# Altium PCB Control_Board_Model_C201_FFC_Sens_Conn.PcbDoc (part 2 of 12)
Units mil, origin at the board's own origin, x right, y up, seen from the top; angles counter-clockwise.
Board outline 3937.01 x 2755.91 mil, 6 copper layers (1-SIG-TOP, 2-GND, 3-PWR, 4-SIG-HOR, 5-SIG-VERT, 6-GND-BOT), stack 46.063 mil thick; 497 components, 379 nets, 1804 pads, 1610 vias.
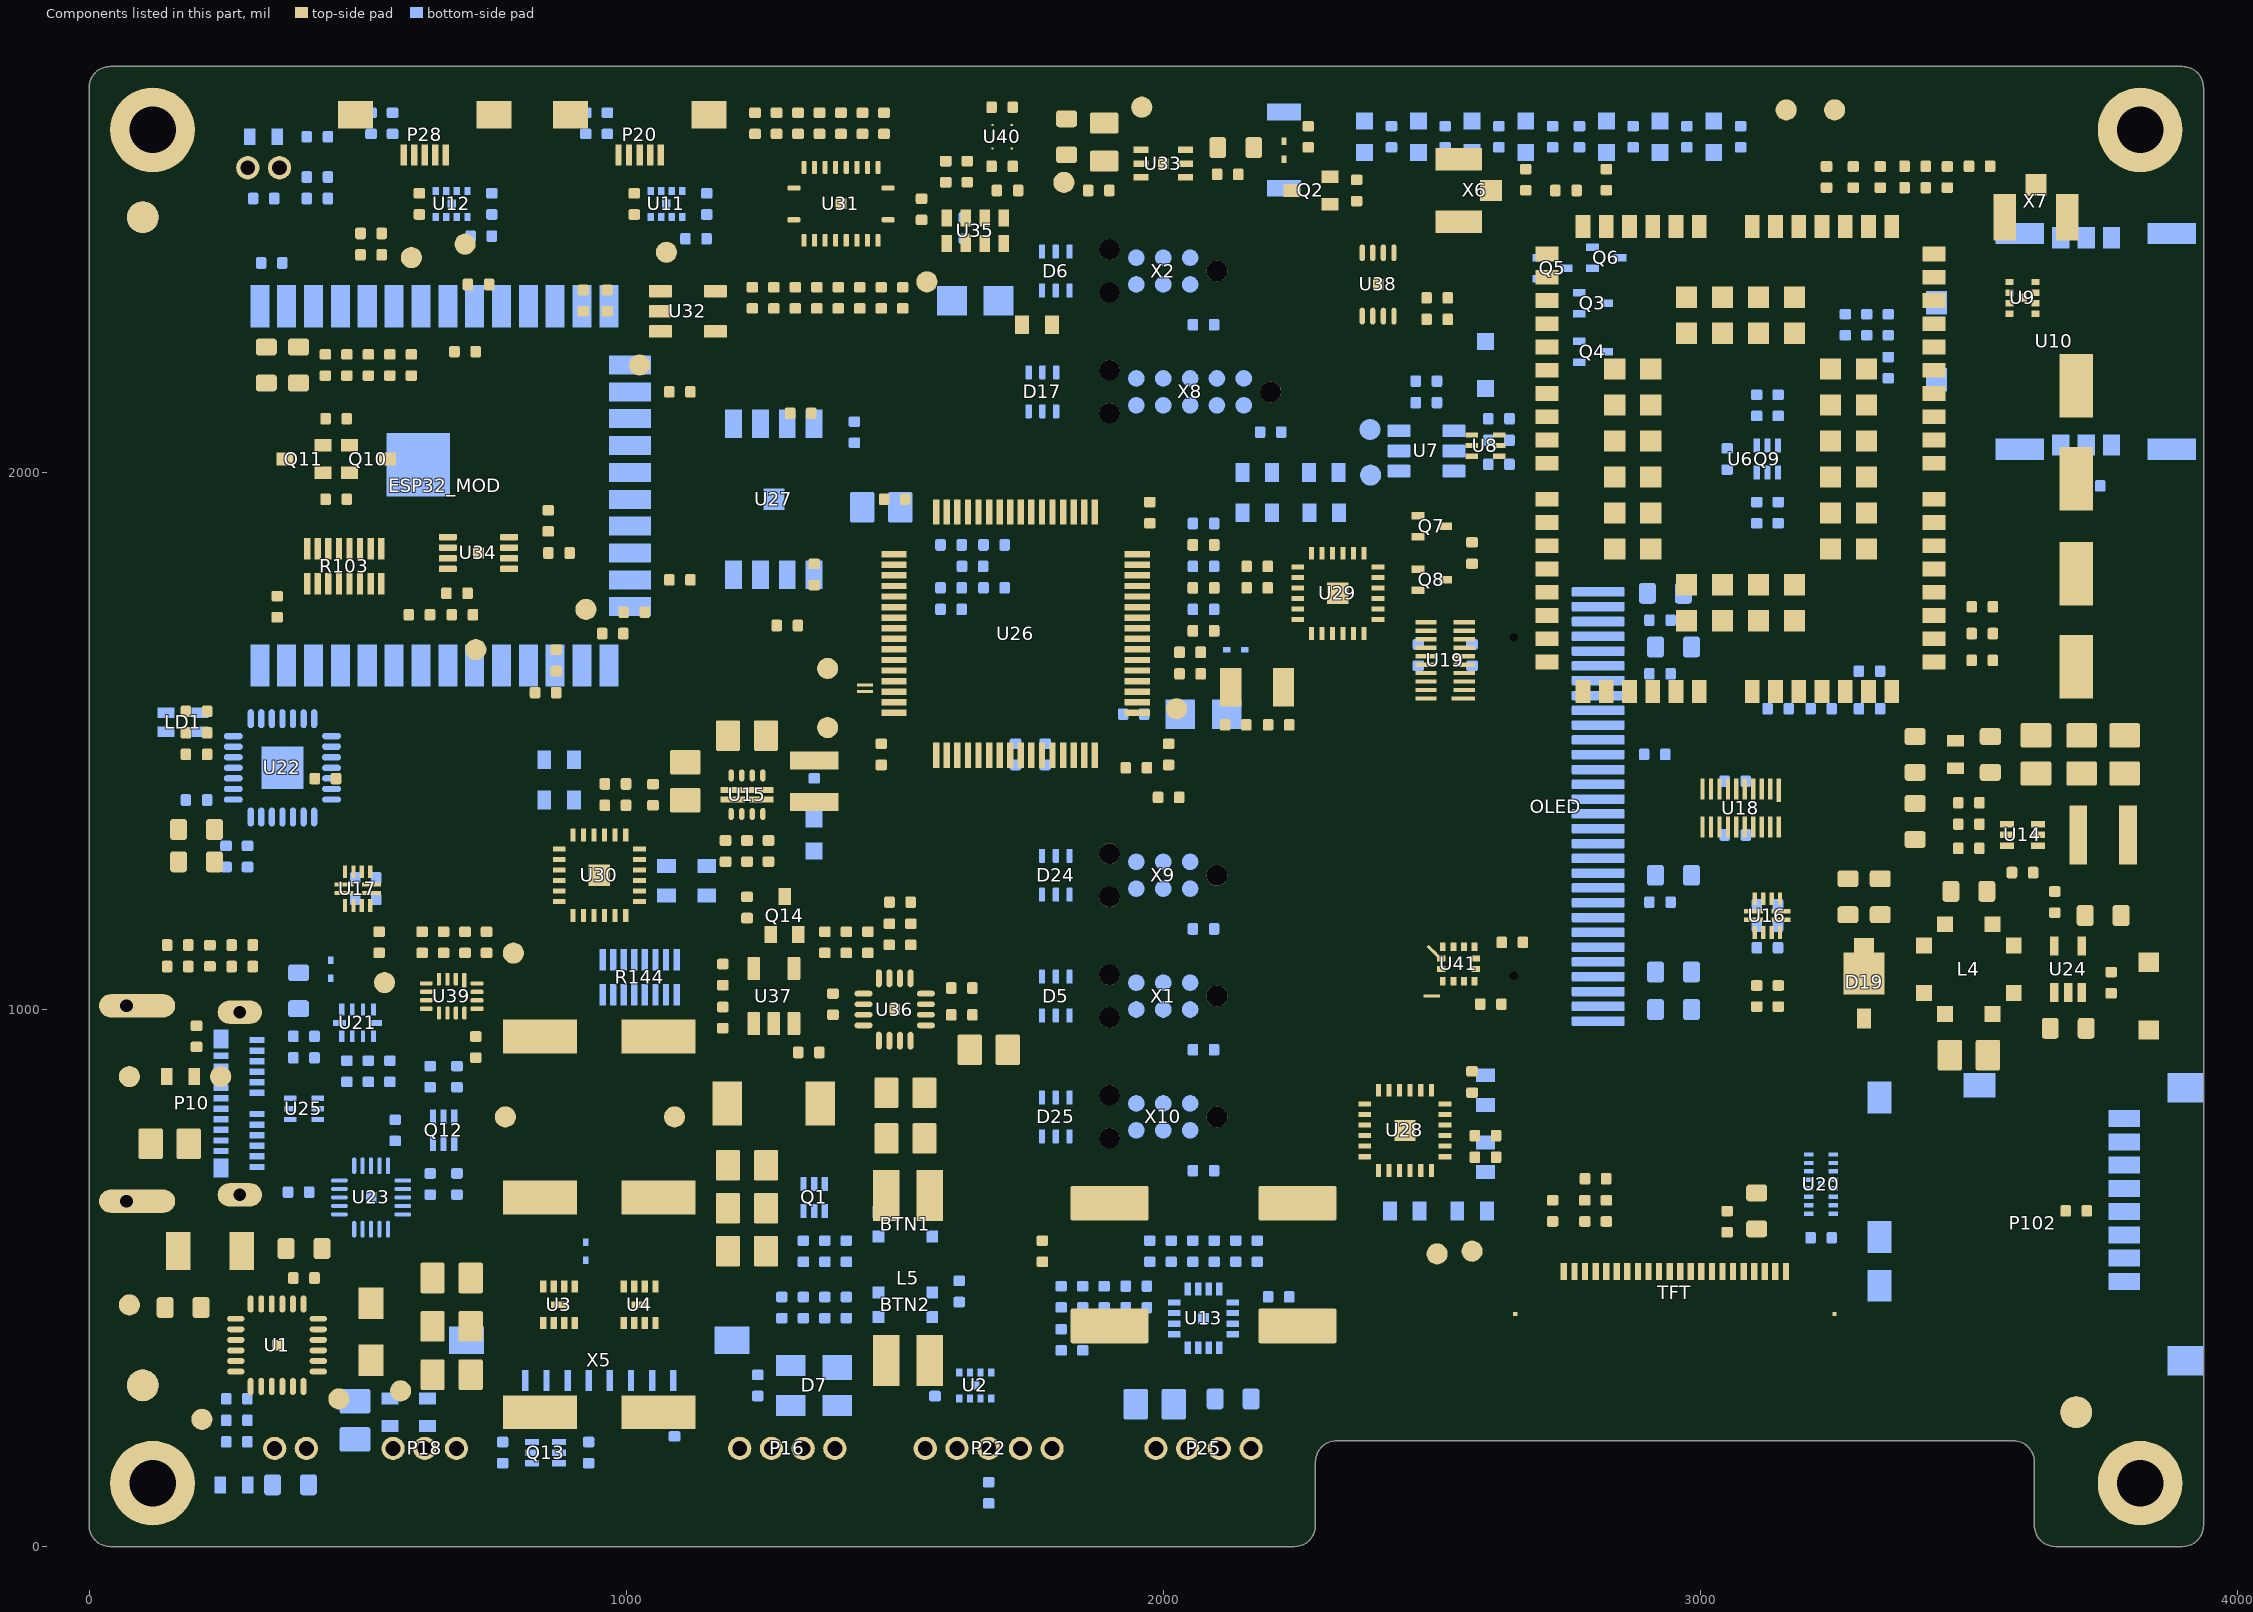
[diagram p6: the components of this part, seen from the top]

## Components (designator, comment, footprint, x,y, rotation, side; value= is the part's Value field where it differs from the comment) (continued)
R106 "RES SMD 402 OHM 1% 1/16W 0402" R0402 200,1475 r180 top (schematic designator R5)
R107 "RES SMD 47K OHM 1% 1/16W 0402" R0402 200,1390 r180 bottom (schematic designator R6)
R108 "RES SMD 10K OHM 1% 1/16W 0402" R0402 440,1430 r0 top (schematic designator R7)
R109 "RES SMD 1K OHM 1% 1/16W 0402" R0402 2725,625 r270 top (schematic designator R1)
R110 "RES SMD 910K OHM 1% 1/16W 0402" R0402 2925,1625 r0 bottom (schematic designator R1)
R111 "RES SMD 1K OHM 1% 1/16W 0402" R0402 2915,1475 r180 bottom (schematic designator R2)
R112 "RES SMD 2.26 OHM 1% 1/10W 0603" R0603 3685,965 r0 top (schematic designator R1)
R113 "RES SMD 63.4K OHM 1% 1/16W 0402" R0402 3765,1050 r270 top (schematic designator R2)
R114 "RES SMD 100K OHM 1% 1/16W 0402" R0402 635,875 r270 bottom (schematic designator R2)
R115 "RES SMD 100K OHM 1% 1/16W 0402" R0402 685,675 r90 bottom (schematic designator R3)
R116 "DNP*" R0402 165,1120 r0 top (schematic designator R4)
R117 "RES SMD 10K OHM 1% 1/16W 0402" R0402 285,1120 r0 top (schematic designator R5)
R118 "RES SMD 0 OHM JUMPER 1/16W 0402" R0402 225,1100 r270 top (schematic designator R6)
R119 "DNP*" R0402 165,1080 r0 top (schematic designator R7)
R120 "RES SMD 10K OHM 1% 1/16W 0402" R0402 285,1080 r0 top (schematic designator R8)
R121 "RES SMD 0 OHM JUMPER 1/16W 0402" R0402 720,930 r90 top (schematic designator R9)
R122 "DNP*" R0402 620,1125 r90 top (schematic designator R10)
R123 "RES SMD 10K OHM 1% 1/16W 0402" R0402 515,1205 r180 bottom (schematic designator R11)
R124 "RES SMD 10K OHM 1% 1/16W 0402" R0402 515,1245 r180 bottom (schematic designator R12)
R125 "RES SMD 2.2 OHM 1% 1/16W 0402" R0402 400,910 r0 bottom (schematic designator R13)
R126 "RES SMD 2.2 OHM 1% 1/16W 0402" R0402 520,885 r90 bottom (schematic designator R14)
R127 "RES SMD 2.2 OHM 1% 1/16W 0402" R0402 480,885 r90 bottom (schematic designator R15)
R128 "DNP*" R0402 660,1125 r270 top (schematic designator R16)
R129 "RES SMD 0 OHM JUMPER 1/16W 0402" R0402 560,885 r270 bottom (schematic designator R17)
R130 "RES SMD 0 OHM JUMPER 1/16W 0402" R0402 1945,1550 r0 bottom (schematic designator R1)
R131 "RES SMD 0 OHM JUMPER 1/16W 0402" R0402 1645,1825 r180 bottom (schematic designator R2)
R132 "RES SMD 100 OHM 1% 1/16W 0402" R0402 2050,1665 r180 top (schematic designator R3)
R133 "RES SMD 390K OHM 1% 1/16W 0402" R0402 2075,1785 r180 top (schematic designator R38)
R134 "RES SMD 390K OHM 1% 1/16W 0402" R0402 2075,1705 r180 top (schematic designator R39)
R135 "RES SMD 100K OHM 1% 1/16W 0402" R0402 770,175 r270 bottom (schematic designator R40)
R136 "RES SMD 75K OHM 1% 1/16W 0402" R0402 2075,1825 r180 bottom (schematic designator R41)
R137 "RES SMD 75K OHM 1% 1/16W 0402" R0402 2075,1705 r180 bottom (schematic designator R42)
R138 "RES SMD 100K OHM 1% 1/16W 0402" R0402 930,175 r270 bottom (schematic designator R43)
R139 "RES SMD 27K OHM 1% 1/16W 0402" R0402 2075,1865 r180 top (schematic designator R44)
R140 "RES SMD 75K OHM 1% 1/16W 0402" R0402 2075,1865 r180 bottom (schematic designator R45)
R141 "RES SMD 10K OHM 1% 1/16W 0402" R0402 1350,1810 r270 top (schematic designator R1)
R142 "RES SMD 10K OHM 1% 1/16W 0402" R0402 1300,1715 r180 top (schematic designator R2)
R143 "RES SMD 10K OHM 1% 1/16W 0402" R0402 1325,2110 r180 top (schematic designator R3)
R144 "RES ARRAY 8 RES 100K OHM 1606" YAG_YC248 1025,1060 r270 bottom (schematic designator R57)
R145 "RES SMD 4.75K OHM 1% 1/16W 0402" R0402 1320,2650 r90 top (schematic designator R102)
R146 "RES SMD 4.75K OHM 1% 1/16W 0402" R0402 1280,2650 r90 top (schematic designator R103)
R147 "RES SMD 4.75K OHM 1% 1/16W 0402" R0402 1275,2325 r270 top (schematic designator R104)
R148 "RES SMD 4.75K OHM 1% 1/16W 0402" R0402 1315,2325 r270 top (schematic designator R105)
R149 "RES SMD 4.75K OHM 1% 1/16W 0402" R0402 1395,2325 r270 top (schematic designator R106)
R150 "RES SMD 4.75K OHM 1% 1/16W 0402" R0402 1435,2325 r270 top (schematic designator R107)
R151 "RES SMD 10K OHM 1% 1/16W 0402" R0402 1360,2650 r270 top (schematic designator R108)
R152 "RES SMD 10K OHM 1% 1/16W 0402" R0402 1240,2650 r270 top (schematic designator R109)
R153 "RES SMD 10K OHM 1% 1/16W 0402" R0402 1355,2325 r90 top (schematic designator R110)
R154 "RES SMD 4.75K OHM 1% 1/16W 0402" R0402 1440,2650 r90 top (schematic designator R111)
R155 "RES SMD 4.75K OHM 1% 1/16W 0402" R0402 1400,2650 r90 top (schematic designator R112)
R156 "RES SMD 10K OHM 1% 1/16W 0402" R0402 1480,2650 r270 top (schematic designator R113)
R157 "RES SMD 10K OHM 1% 1/16W 0402" R0402 2120,2555 r0 top (schematic designator R1)
R158 "RES SMD 100 OHM 1% 1/2W 0805" R0805 1890,2615 r90 top (schematic designator R2)
R159 "RES SMD 10K OHM 1% 1/16W 0402" R0402 1630,2455 r270 bottom (schematic designator R1)
R160 "RES SMD 402 OHM 1% 1/16W 0402" R0402 1595,2560 r90 bottom (schematic designator R2)
R161 "RES SMD 10K OHM 1% 1/16W 0402" R0402 1595,2560 r270 top (schematic designator R3)
R162 "RES SMD 54.9K OHM 1% 1/16W 0402" R0402 1385,1010 r90 top (schematic designator R1)
R163 "RES SMD 1.2K OHM 1% 1/16W 0402" R0402 1530,1140 r270 top (schematic designator R2)
R164 "DNP*" R0402 1340,920 r0 top (schematic designator R3)
R165 "RES SMD 10K OHM 1% 1/16W 0402" R0402 1450,1125 r90 top (schematic designator R4)
R166 "RES SMD 2.7K OHM 1% 1/16W 0402" R0402 1370,1125 r270 top (schematic designator R5)
R167 "RES SMD 44.2K OHM 1% 1/16W 0402" R0402 1410,1125 r270 top (schematic designator R6)
R168 "RES SMD 11K OHM 1% 1/16W 0402" R0402 1225,1190 r270 top (schematic designator R7)
TFT "LH200K-IF05" CONN_0524352271 2952.76,389.76 r90 top locked
TP1 "Test Point Pad" TESTPOINT 925,1745 r90 top (schematic designator TP3)
TP2 "Test Point Pad" TESTPOINT 720,1670 r90 top (schematic designator TP4)
TP3 "Test Point Pad" TESTPOINT 2510,545 r90 top (schematic designator TP5)
TP4 "Test Point Pad" TESTPOINT 2575,550 r90 top (schematic designator TP6)
TP5 "Test Point Pad" TESTPOINT 1075,2410 r90 top (schematic designator TP7)
TP6 "Test Point Pad" TESTPOINT 1025,2200 r90 top (schematic designator TP8)
TP7 "Test Point Pad" TESTPOINT 790,1105 r90 top (schematic designator TP9)
TP8 "Test Point Pad" TESTPOINT 550,1050 r90 top (schematic designator TP10)
TP9 "Test Point Pad" TESTPOINT 700,2425 r90 top (schematic designator TP11)
TP10 "Test Point Pad" TESTPOINT 600,2400 r90 top (schematic designator TP12)
TP11 "Test Point Pad" TESTPOINT 1090,800 r90 top (schematic designator TP13)
TP12 "Test Point Pad" TESTPOINT 1960,2680 r90 top (schematic designator TP14)
TP13 "Test Point Pad" TESTPOINT 3160,2675 r90 top (schematic designator TP15)
TP14 "Test Point Pad" TESTPOINT 1375,1525 r90 top (schematic designator TP16)
TP15 "Test Point Pad" TESTPOINT 580,290 r90 top (schematic designator TP17)
TP16 "Test Point Pad" TESTPOINT 465,275 r90 top (schematic designator TP18)
TP17 "Test Point Pad" TESTPOINT 245,875 r90 top (schematic designator TP19)
TP18 "Test Point Pad" TESTPOINT 75,875 r90 top (schematic designator TP20)
TP19 "Test Point Pad" TESTPOINT 1815,2540 r90 top (schematic designator TP21)
TP20 "Test Point Pad" TESTPOINT 3250,2675 r90 top (schematic designator TP22)
TP21 "Test Point Pad" TESTPOINT 1375,1635 r90 top (schematic designator TP23)
TP22 "Test Point Pad" TESTPOINT 775,800 r90 top (schematic designator TP24)
TP23 "Test Point Pad" TESTPOINT 210,237 r90 top (schematic designator TP25)
TP24 "Test Point Pad" TESTPOINT 75,450 r90 top (schematic designator TP26)
TP25 "Test Point Pad" TESTPOINT 2385,2080 r180 bottom (schematic designator TP1)
TP26 "Test Point Pad" TESTPOINT 2386,1995 r180 bottom (schematic designator TP2)
TP27 "Test Point Pad" TESTPOINT 2025,1560 r90 top (schematic designator TP1)
TP28 "Test Point Pad" TESTPOINT 1560,2355 r90 top (schematic designator TP1)
U1 "BQ25611DRTWT" RTW0024 350,375 r0 top (schematic designator U2)
U2 "TPD3F303DPVR" DPV8_1P7X0P4 1650,300 r90 bottom (schematic designator U3)
U3 "NUF4401MNT1G" DFN8 875,450 r90 top (schematic designator U6)
U4 "NUF4401MNT1G" DFN8 1025,450 r90 top (schematic designator U7)
U6 "BG95-M1" BG95 3075,2025 r0 top value=BG95 (schematic designator U8)
U7 "USBLC6-2SC6" SOT-23-6 2490,2040 r180 bottom (schematic designator U9)
U8 "ECMF02-2AMX6" QFN-6L 2600,2050 r180 top (schematic designator U10)
U9 "TPD3F303DPVR" DPV8_1P7X0P4 3600,2325 r180 top (schematic designator U11)
U10 "1042240820" 1042240820_MOL 3692.91,2244.09 r270 bottom (schematic designator U12)
U11 "TPD3F303DPVR" DPV8_1P7X0P4 1075,2500 r270 bottom (schematic designator U4)
U12 "TPD3F303DPVR" DPV8_1P7X0P4 675,2500 r270 bottom (schematic designator U5)
U13 "STSPIN220" VFQFPN-16_STM 2075,425 r180 bottom (schematic designator U1)
U14 "TPS61023DRLT" SOT50P160X60-6N 3600,1325 r0 top (schematic designator U1)
U15 "TPS6209733RWKR" RWK11 1225,1400 r180 top (schematic designator U1)
U16 "TS3USB3031RMGR" RMG12_TEX 3125,1175 r180 top (schematic designator U1)
U17 "TS3USB3031RMGR" RMG12_TEX 500,1225 r180 top (schematic designator U1)
U18 "TXB0108DQSR" DQS20_TEX 3075,1375 r270 top (schematic designator U9)
U19 "TXB0108DQSR" DQS20_TEX 2525,1650 r180 top (schematic designator U9)
U20 "EMIF06-MSD02N16" "QFN 3.5X1.2-16L" 3225,675 r0 bottom (schematic designator U1)
U21 "BQ24392RSER" RSE10_TEX 500,975 r270 bottom (schematic designator U1)
U22 "CP2102N-A02-GQFN28R" QFN28_5X5 360,1450 r90 bottom (schematic designator U1)
U23 "TPD6S300ARUKR" WQFN20_RUK_TEX 525,650 r0 bottom (schematic designator U1)
U24 "TPS61169DCKR" DCK0005A_L 3685,1075 r90 top (schematic designator U1)
U25 "ECMF02-2AMX6" QFN-6L 400,815 r180 bottom (schematic designator U1)
U26 "STM32G473RET6" LQFP64-10X10MM 1725,1700 r180 top (schematic designator U1)
U27 "MT25QL256ABA1EW9-0SIT TR" W-PDFN-8_8X6_P127 1275,1950 r90 bottom (schematic designator U1)
U28 "PCAL9539AHF,128" "QFN-EP 24" 2450,775 r270 top (schematic designator U1)
U29 "PCAL9539AHF,128" "QFN-EP 24" 2325,1775 r90 top (schematic designator U1)
U30 "PCAL9539AHF,128" "QFN-EP 24" 950,1250 r0 top (schematic designator U1)
U31 "PCA9545ARGYR" RGY20_3P05X2P05 1400,2500 r270 top (schematic designator U1)
U32 "24LC00T-I/OT" SOT-23-5 1115,2300 r0 top (schematic designator U1)
U33 "TPS22810DRVT" "WSON-6 065" 2000,2575 r0 top (schematic designator U1)
U34 "ATECC608A-MAHDA-S" UDFN8_2X3MC_MCH 725,1850 r180 top (schematic designator U1)
U35 "RV-3028-C7 32.768KHZ 1PPM-TA-QC" "8-SON (3.2X1.5)" 1650,2450 r90 top (schematic designator U1)
U36 "TPS55340RTET" RTE0016C 1500,1000 r180 top (schematic designator U1)
U37 "OPA171AIDBVR" SOT-23-5 1275,1025 r90 top (schematic designator U2)
U38 "PCA9632TK,118" SOT908-1 2400,2350 r270 top (schematic designator U1)
U39 "TS3USBCA410IRSVT" RSV16_TEX 675,1025 r270 top (schematic designator U1)
U40 "LDLN025PU18R" DFN65P100X40-4N 1700,2625 r270 top (schematic designator U1)
U41 "BMA253" LGA12C50P4X4_200X200X100 2550,1085 r90 top (schematic designator U1)
X1 "SWD" TC2030-IDC-NL 2000,1025 r180 bottom
X2 "DEBUG" TC2030-IDC-NL 2000,2375 r180 bottom (schematic designator X1)
X3 "NX3215SA-32.768KHZ-EXS00A-MU00525" XTAL_2SM_3R2X1R5 2175,1600 r0 top (schematic designator X1)
X4 "T-DET" CONN_S2B-ZR_JST 325,2650 r180 top (schematic designator X2)
X5 "KEYPAD" 686108183522 950,400 r0 bottom (schematic designator X3)
X6 "U.FL-R-SMT-1(10)" "CONN U.FL RCPT STR 50 OHM SMD" 2550,2525 r270 top (schematic designator X4)
X7 "U.FL-R-SMT-1(10)" "CONN U.FL RCPT STR 50 OHM SMD" 3625,2475 r0 top (schematic designator X5)
X8 "JTAG" TC2050-IDC-NL 2050,2150 r90 bottom (schematic designator X1)
X9 "BG95_DEBUG" TC2030-IDC-NL 2000,1250 r180 bottom (schematic designator X1)
X10 "BG95_UART" TC2030-IDC-NL 2000,800 r180 bottom (schematic designator X1)

## Footprints (in the part's own frame and the unit in brackets; to place one, negate y for a bottom-side part, rotate by r counter-clockwise, add the part's x,y. Pads: shape width x height; smd on the part's side, far side on the other; paste and mask are expansions set on the pad)
"8-SON (3.2X1.5)" [mm] "8-WCDFN"
  rect 0.8x0.5 smd: 1(-0.6,1.35) 2(-0.6,0.45) 3(-0.6,-0.45) 4(-0.6,-1.35) 5(0.6,-1.35) 6(0.6,-0.45) 7(0.6,0.45) 8(0.6,1.35)
  silkscreen extent -1.33,1.71 -1.23,1.81, body extent -0.77,-1.63 0.77,1.63, height 0.8
1042240820_MOL [mm]
  rect 1.1x1 smd: 11(-1.82,6.425) 12(1.82,6.425)
  rect 1x2.3 smd: G1(-5.1,-4.7) G2(-5.1,2.5) G3(5.1,2.5) G4(5.1,-4.7)
  rect 1x0.8 smd paste+0: S1(4.9,-1.85)
  rect 1x0.813 smd paste+0: S2(4.9,-0.65) S3(-4.9,-1.85) S4(4.9,0.55) S5(-4.9,-0.65) S6(-4.9,0.55)
  1-SIG-TOP keep-out region: -0.6,-2.95 0.6,-2.95 0.6,-5.85 -0.6,-5.85
  1-SIG-TOP keep-out region: 1.94,-2.95 3.14,-2.95 3.14,-5.85 1.94,-5.85
  1-SIG-TOP keep-out region: -3.14,-2.95 -1.94,-2.95 -1.94,-5.85 -3.14,-5.85
  1-SIG-TOP keep-out region: -0.6,4.55 0.6,4.55 0.6,1.45 -0.6,1.45
  1-SIG-TOP keep-out region: 1.94,4.55 3.14,4.55 3.14,1.45 1.94,1.45
  1-SIG-TOP keep-out region: -3.14,4.55 -1.94,4.55 -1.94,1.45 -3.14,1.45
  silkscreen extent -5.05,-3.21 6.1,6.33, body extent -5.18,-6.3 5.17,6.25, height 1.03
5025700893 [mm] "Card Connector Secure Digital - microSD™ Surface Mount, Right Angle Gold 10 (8 + 2) Position"
  rect 1.4x1.7 smd: 0(-6.45,7.15) 0(6.45,7.15)
  rect 1.5x1.15 smd: 0(-2.9,-7.325) 0(6,-7.325) 9(-0.6,-7.325)
  rect 0.8x1.5 smd: 1(-2.7,4.25) 2(-1.6,4.25) 3(-0.5,4.25) 4(0.6,4.25) 5(1.7,4.25) 6(2.8,4.25) 7(3.9,4.25) 8(5,4.25)
  rect 1.15x1.5 smd: 10(6.575,-2.6)
  1-SIG-TOP keep-out region: 6.199,-0.65 6.699,-0.65 6.699,-1.6 6.199,-1.6
  1-SIG-TOP keep-out region: 4,-5.15 6.9,-5.15 6.9,-6.55 4,-6.55
  1-SIG-TOP keep-out region: 0.45,-6.95 1.35,-6.95 1.35,-7.45 0.45,-7.45
  silkscreen extent -7.15,-7.9 7.15,6, body extent -6.9,-7.65 6.9,7.85, height 1.8
74438323010 [mm] "1µH Shielded Molded Inductor 2.5A 75mOhm Max 1008 (2520 Metric)"
  rect 0.85x2.3 smd: 1(-0.975,0) 2(0.975,0)
  silkscreen extent -0.3,-1.1 0.3,1.1, body extent -1.25,-1 1.25,1, height 1
686108183522 [mm] "ZIF Connectors, Horizontal, Bottom Contact Low Profile, pitch 1mm, 8p"
  rect 0.3x1 smd: 1(-3.5,2.3) 2(-2.5,2.3) 3(-1.5,2.3) 4(-0.5,2.3) 5(0.5,2.3) 6(1.5,2.3) 7(2.5,2.3) 8(3.5,2.3)
  rect 1.65x1.3 smd: MP1(-6.275,0.4) MP2(6.275,0.4)
  silkscreen extent -7.18,-1.95 7.18,1.95, body extent -7.1,-1.9 7.1,2.35, height 1.24
BG95 [mm]
  rect 1.1x0.7 smd mask+0.05: 1(-9.15,9.7) 2(-9.15,8.6) 3(-9.15,7.5) 4(-9.15,6.4) 5(-9.15,5.3) 6(-9.15,4.2) 7(-9.15,3.1) 8(-9.15,2) 9(-9.15,0.9) 10(-9.15,-0.2) 11(-9.15,-1.9) 12(-9.15,-3) 13(-9.15,-4.1) 14(-9.15,-5.2) 15(-9.15,-6.3) 16(-9.15,-7.4) 17(-9.15,-8.5) 18(-9.15,-9.6) 32(9.15,-9.6) 33(9.15,-8.5) 34(9.15,-7.4) 35(9.15,-6.3) 36(9.15,-5.2) 37(9.15,-4.1) 38(9.15,-3) 39(9.15,-1.9) 40(9.15,-0.2) 41(9.15,0.9) 42(9.15,2) 43(9.15,3.1) 44(9.15,4.2) 45(9.15,5.3) 46(9.15,6.4) 47(9.15,7.5) 48(9.15,8.6) 49(9.15,9.7)
  rect 0.7x1.1 smd mask+0.05: 19(-7.45,-11) 20(-6.35,-11) 21(-5.25,-11) 22(-4.15,-11) 23(-3.05,-11) 24(-1.95,-11) 25(0.55,-11) 26(1.65,-11) 27(2.75,-11) 28(3.85,-11) 29(4.95,-11) 30(6.05,-11) 31(7.15,-11) 50(7.15,11) 51(6.05,11) 52(4.95,11) 53(3.85,11) 54(2.75,11) 55(1.65,11) 56(0.55,11) 57(-1.95,11) 58(-3.05,11) 59(-4.15,11) 60(-5.25,11) 61(-6.35,11) 62(-7.45,11)
  rect 1x1 smd mask+0.05: 63(-5.95,4.25) 64(-5.95,2.55) 65(-5.95,0.85) 66(-5.95,-0.85) 67(-5.95,-2.55) 68(-5.95,-4.25) 69(-2.55,-7.65) 70(-0.85,-7.65) 71(0.85,-7.65) 72(2.55,-7.65) 73(5.95,-4.25) 74(5.95,-2.55) 75(5.95,-0.85) 76(5.95,0.85) 77(5.95,2.55) 78(5.95,4.25) 79(2.55,7.65) 80(0.85,7.65) 81(-0.85,7.65) 82(-2.55,7.65) 83(-4.25,4.25) 84(-4.25,2.55) 85(-4.25,0.85) 86(-4.25,-0.85) 87(-4.25,-2.55) 88(-4.25,-4.25) 89(-2.55,-5.95) 90(-0.85,-5.95) 91(0.85,-5.95) 92(2.55,-5.95) 93(4.25,-4.25) 94(4.25,-2.55) 95(4.25,-0.85) 96(4.25,0.85) 97(4.25,2.55) 98(4.25,4.25) 99(2.55,5.95) 100(0.85,5.95) 101(-0.85,5.95) 102(-2.55,5.95)
  silkscreen extent -9.95,-11.8 9.95,11.8, body extent -10.02,-11.88 10.02,11.88, height 2.4
C0402 [mm]
  rrect35% 0.5x0.55 smd: 1(-0.5,0) 2(0.5,0)
  silkscreen extent -1,-0.5 1,0.5, body extent -0.52,-0.28 0.52,0.28, height 0.55
C0603 [mm]
  rrect35% 0.8x0.991 smd: 1(-0.85,0) 2(0.85,0)
  silkscreen extent -1.52,-0.75 1.52,0.75, body extent -0.87,-0.48 0.87,0.48, height 0.87
C0805 [mm]
  rrect15% 1.15x1.45 smd: 1(-0.9,0) 2(0.9,0)
  silkscreen extent -1.78,-0.94 1.77,0.94, body extent -1.1,-0.72 1.1,0.73, height 0.88
C1206 [mm]
  rect 1.15x1.8 smd: 1(-1.5,0) 2(1.5,0)
  silkscreen extent -2.51,-1.3 2.51,1.27, body extent -1.7,-0.89 1.7,0.91, height 1.75
CAPCP3225X100N [mm]
  rect 1.4x1.4 smd: 1(-1.1,0) 2(1.1,0)
  silkscreen extent -1.6,-1.25 1.6,1.25, body extent -1.6,-1.25 1.6,1.25, height 1
"CONN U.FL RCPT STR 50 OHM SMD" [mm] "U.FL (UMCC) Connector Receptacle, Male Pin 50Ohm Surface Mount Solder"
  rect 1.05x2.2 smd: 1(-1.475,0) 3(1.475,0)
  rect 1x1.05 smd: 2(0,1.525)
  body extent -1.5,-1.55 1.5,1.55, height 1.25
CONN_0524352271 [mm] "TFT LCD MODULE"
  rect 0.8x0.3 smd mask+0.05: 1(3.1,-5.25) 2(3.1,-4.75) 3(3.1,-4.25) 4(3.1,-3.75) 5(3.1,-3.25) 6(3.1,-2.75) 7(3.1,-2.25) 8(3.1,-1.75) 9(3.1,-1.25) 10(3.1,-0.75) 11(3.1,-0.25) 12(3.1,0.25) 13(3.1,0.75) 14(3.1,1.25) 15(3.1,1.75) 16(3.1,2.25) 17(3.1,2.75) 18(3.1,3.25) 19(3.1,3.75) 20(3.1,4.25) 21(3.1,4.75) 22(3.1,5.25)
  rect 0.2x0.2 smd mask+0.05: 23(1.1,7.55) 24(1.1,-7.55)
  1-SIG-TOP pour cut-out: -0.55,-6.3 -0.55,-8 0.3,-8 0.3,-9.1 2.9,-9.1 2.9,-6.3 2.2,-6.3 2.2,-5.7 0.8,-5.7 0.8,-6.3
  1-SIG-TOP pour cut-out: -0.55,6.3 -0.55,8 0.3,8 0.3,9.1 2.9,9.1 2.9,6.3 2.2,6.3 2.2,5.7 0.8,5.7 0.8,6.3
  1-SIG-TOP region: 2.7,-6.5 2.7,-8.9 0.5,-8.9 0.5,-7.8 -0.35,-7.8 -0.35,-6.5
  1-SIG-TOP region: 2.7,6.5 2.7,8.9 0.5,8.9 0.5,7.8 -0.35,7.8 -0.35,6.5
  1-SIG-TOP keep-out region: 0.8,-6.5 2.2,-6.5 2.2,-5.7 0.8,-5.7
  1-SIG-TOP keep-out region: 0.8,5.7 2.2,5.7 2.2,6.5 0.8,6.5
  silkscreen extent -2.3,-8.5 4.1,8.5, body extent -2,-17.3 47.3,17.3, height 2.1
CONN_0545500571 [mm] "5 Position FFC, FPC Connector Contacts, Top 0.020\" (0.50mm) Surface Mount, Right Angle"
  rect 1.65x1.3 smd mask+0.05: 0(-3.275,-0.4) 0(3.275,-0.4)
  rect 0.3x1 smd mask+0.05: 1(-1,1.5) 2(-0.5,1.5) 3(0,1.5) 4(0.5,1.5) 5(1,1.5)
  silkscreen extent -4.1,-2.3 4.1,2.1, body extent -3.85,-3.3 3.85,1.7, height 1.2
CONN_S2B-ZR_JST [mm] "Connector Header Through Hole, Right Angle 2 position 0.059\" (1.50mm)"
  round 1.1 hole 0.7: 1(-0.75,2.1) 2(0.75,2.1)
  silkscreen extent -2.37,-2.29 2.37,4.3, body extent -2.25,-2.49 2.25,3.51, height 3.8
CONN_S3B-ZR_JST [mm] "Connector Header Through Hole, Right Angle 3 position 0.059\" (1.50mm)"
  round 1.1 hole 0.7: 1(-1.5,2.1) 2(0,2.1) 3(1.5,2.1)
  silkscreen extent -3.12,-2.29 3.1,4.2, body extent -3,-2.49 3,3.51, height 3.8
CONN_S4B-ZR(LF)(SN) [mm] "CONN HEADER R/A 4POS 1.5MM"
  round 1.1 hole 0.7: 1(-2.25,2.1) 2(-0.75,2.1) 3(0.75,2.1) 4(2.25,2.1)
  silkscreen extent -3.92,-2.29 3.87,4.1, body extent -3.75,-2.5 3.75,3.5, height 3.8
CONN_S5B-ZR(LF)(SN) [mm] "CONN HEADER R/A 5POS 1.5MM"
  round 1.1 hole 0.7: 1(-3,2.1) 2(-1.5,2.1) 3(0,2.1) 4(1.5,2.1) 5(3,2.1)
  silkscreen extent -4.67,-2.29 4.7,4.1, body extent -4.5,-2.5 4.5,3.5, height 3.8
DCK0005A_L [mm]
  rect 0.9x0.4 smd paste-0.025 mask+0.05: 1(-1.1,0.65) 2(-1.1,0) 3(-1.1,-0.65) 4(1.1,-0.65) 5(1.1,0.65)
  silkscreen extent -0.7,-1.2 0.7,1.2, body extent -1.05,-1 1.05,1, height 1
DFN8 [mm] "DFN8 2x2, 0.5P CASE 506AQ"
  rect 0.57x0.3 smd mask+0.05: 1(-0.865,0.75) 2(-0.865,0.25) 3(-0.865,-0.25) 4(-0.865,-0.75) 5(0.865,-0.75) 6(0.865,-0.25) 7(0.865,0.25) 8(0.865,0.75)
  rect 0.3x0.75 smd mask+0.05: GP(0,0)
  1-SIG-TOP region: -0.375,-0.7 0.375,-0.7 0.375,0.7 -0.375,0.7
  silkscreen extent -1.02,-1.05 0.25,1.22, body extent -1,-1 1,1, height 1
DFN65P100X40-4N [mm] "DFN, 4-Leads, Body 1.00x1.00mm, Pitch 0.65mm, IPC Medium Density"
  rect 0.1x0.1 smd paste-0.2 mask-0.2: 1(-0.55,0.455) 2(-0.55,-0.455) 3(0.55,-0.455) 4(0.55,0.455) 5(0,0)
  1-SIG-TOP region: 0,-0.323 0.323,0 0,0.323 -0.323,0
  1-SIG-TOP region: -0.6,-0.505 -0.6,-0.205 -0.335,-0.205 -0.185,-0.355 -0.185,-0.505
  1-SIG-TOP region: 0.6,0.505 0.6,0.205 0.335,0.205 0.185,0.355 0.185,0.505
  1-SIG-TOP region: 0.6,-0.505 0.6,-0.205 0.335,-0.205 0.185,-0.355 0.185,-0.505
  1-SIG-TOP region: -0.6,0.505 -0.6,0.205 -0.335,0.205 -0.185,0.355 -0.185,0.505
  silkscreen extent -0.55,0.75 -0.45,0.85, body extent -0.53,-0.53 0.53,0.53, height 0.4
DPV8_1P7X0P4 [mm]
  rect 0.38x0.3 smd paste+0 mask+0.05: 1(-0.61,0.75) 2(-0.61,0.25) 3(-0.61,-0.25) 4(-0.61,-0.75) 5(0.61,-0.75) 6(0.61,-0.25) 7(0.61,0.25) 8(0.61,0.75)
  rect 0.4x0.4 smd paste-0.837 mask+0.05: 9(0,0)
  1-SIG-TOP region: -0.2,0.85 0.2,0.85 0.2,-0.85 -0.2,-0.85
  silkscreen extent -1.15,-1.2 0.8,1.2, body extent -0.8,-1.05 0.8,1.05, height 0.65
DQS20_TEX [mm]
  rect 1.1x0.2 smd paste-0.1 mask+0.05: 1(-0.85,1.8)
  rect 1x0.2 smd paste-0.1 mask+0.05: 2(-0.9,1.4) 3(-0.9,1) 4(-0.9,0.6) 5(-0.9,0.2) 6(-0.9,-0.2) 7(-0.9,-0.6) 8(-0.9,-1) 9(-0.9,-1.4) 10(-0.9,-1.8) 11(0.9,-1.8) 12(0.9,-1.4) 13(0.9,-1) 14(0.9,-0.6) 15(0.9,-0.2) 16(0.9,0.2) 17(0.9,0.6) 18(0.9,1) 19(0.9,1.4) 20(0.9,1.8)
  silkscreen extent -1.45,-2.15 1,2.25, body extent -1.07,-2.02 1.07,2.02, height 0.55
FIDUCIAL [mm]
  round 1.5 smd paste+0 mask+0.75: ""(0,0)
  round 1.5 smd far side paste+0 mask+0.75: ""(0,0)
  1-SIG-TOP pour cut-out: 0,1.6 0.158,1.6 0.467,1.538 0.758,1.418 1.02,1.243 1.243,1.02 1.418,0.758 1.538,0.467 1.6,0.158 1.6,0 1.6,0 1.6,-0.158 1.538,-0.467 1.418,-0.758 1.243,-1.02 1.02,-1.243 0.758,-1.418 0.467,-1.539 0.158,-1.6 0,-1.6 -0.158,-1.6 -0.467,-1.538 -0.758,-1.418 -1.02,-1.243 -1.243,-1.02 -1.418,-0.758 -1.538,-0.467 -1.6,-0.158 -1.6,0 -1.6,0.158 -1.538,0.467 -1.418,0.758 -1.243,1.02 -1.02,1.243 -0.758,1.418 -0.467,1.538 -0.158,1.6 0,1.6
  6-GND-BOT pour cut-out: 0,1.6 0.158,1.6 0.467,1.538 0.758,1.418 1.02,1.243 1.243,1.02 1.418,0.758 1.538,0.467 1.6,0.158 1.6,0 1.6,-0.158 1.538,-0.467 1.418,-0.758 1.243,-1.02 1.02,-1.243 0.758,-1.418 0.467,-1.539 0.158,-1.6 0,-1.6 -0.158,-1.6 -0.467,-1.538 -0.758,-1.418 -1.02,-1.243 -1.243,-1.02 -1.418,-0.758 -1.538,-0.467 -1.6,-0.158 -1.6,0 -1.6,0.158 -1.538,0.467 -1.418,0.758 -1.243,1.02 -1.02,1.243 -0.758,1.418 -0.467,1.538 -0.158,1.6 0,1.6
  body extent -1.49,-1.5 1.5,1.5
IND_IHLP-1212B00 [mm] "1µH Shielded Molded Inductor 5A 24mOhm Max Nonstandard"
  rect 1.5x1.2 smd: 1(-1.35,0) 2(1.35,0)
  silkscreen extent -2,-1.73 2,1.73, body extent -1.8,-1.6 1.8,1.6, height 2.06
IND_LPD5030 [mm] "Shielded Coupled Inductors"
  rect 0.75x0.75 smd: 1(-2.125,1.125) 1(-1.125,2.125) 2(-2.125,-1.125) 2(-1.125,-2.125) 3(1.125,-2.125) 3(2.125,-1.125) 4(1.125,2.125) 4(2.125,1.125)
  1-SIG-TOP region: -0.75,-1.75 -0.75,-2.5 -1.7,-2.5 -2.5,-1.7 -2.5,-0.75 -1.75,-0.75 -1.75,-1.151 -1.151,-1.75
  1-SIG-TOP region: 1.75,-0.75 2.5,-0.75 2.5,-1.7 1.7,-2.5 0.75,-2.5 0.75,-1.75 1.151,-1.75 1.75,-1.151
  1-SIG-TOP region: 0.75,1.75 0.75,2.5 1.7,2.5 2.5,1.7 2.5,0.75 1.75,0.75 1.75,1.151 1.151,1.75
  1-SIG-TOP region: -1.75,0.75 -2.5,0.75 -2.5,1.7 -1.7,2.5 -0.75,2.5 -0.75,1.75 -1.151,1.75 -1.75,1.151
  silkscreen extent -2.8,-2.8 2.8,2.8, body extent -2.44,-2.44 2.44,2.44, height 2.98
IND_MSD1048H [mm] "Shielded Coupled Inductors"
  rect 2.4x1.25 smd: 1(-3.9,1.025) 2(-3.9,-1.025) 3(3.9,-1.025) 4(3.9,1.025)
  silkscreen extent -5.38,-5.38 5.38,5.38, body extent -5.15,-5.15 5.15,5.15, height 5.1
IND_WE_LQSH_3012 [mm] "FIXED IND 1UH 2.4A 54 MOHM MAX"
  rect 0.85x2.8 smd: 1(-1.175,0) 2(1.175,0)
  silkscreen extent -2,-1.8 2,1.8, body extent -1.5,-1.52 1.5,1.53, height 1.25
L0402 [mm]
  rrect35% 0.5x0.55 smd: 1(-0.5,0) 2(0.5,0)
  silkscreen extent -1,-0.51 1,0.5, body extent -0.53,-0.25 0.53,0.25, height 0.71
L0603 [mm]
  rrect35% 0.8x1 smd: 1(-0.85,0) 2(0.85,0)
  silkscreen extent -1.5,-0.75 1.5,0.75, body extent -0.8,-0.4 0.8,0.4, height 0.8
LED_0603 [mm] "LED Indication - Discrete 0603"
  rect 0.8x0.8 smd: 1(-0.75,0) 2(0.75,0)
  silkscreen extent -1.15,0.75 -1.05,0.85, body extent -0.8,-0.4 0.8,0.4, height 0.55
LED_0606_RGB_WURTH [mm] "Chip; Body 1.6 x 1.6 mm (LxW typ) WURTH"
  rect 0.8x0.5 smd: A(-0.8,0.45) BK(-0.8,-0.45) GK(0.8,-0.45) RK(0.8,0.45)
  body extent -0.8,-0.8 0.8,0.8, height 0.4
LGA12C50P4X4_200X200X100 [mm] "LGA, 12-Leads, Body 2.00x2.00mmx1.00mm, Pitch 0.50mm"
  rect 0.41x0.28 smd mask+0.05: 1(-0.815,0.75) 2(-0.815,0.25) 3(-0.815,-0.25) 4(-0.815,-0.75) 7(0.815,-0.75) 8(0.815,-0.25) 9(0.815,0.25) 10(0.815,0.75)
  rect 0.28x0.41 smd mask+0.05: 5(-0.25,-0.815) 6(0.25,-0.815) 11(0.25,0.815) 12(-0.25,0.815)
  1-SIG-TOP keep-out region: -0.457,-0.457 0.457,-0.457 0.457,0.457 -0.457,0.457
  body extent -1.04,-1.04 1.04,1.04, height 1
LOGO_ACME_CPU [mil]
Logo_ESD [mil] "Silk only"
  silkscreen extent -131,-88 142,145
LQFP64-10X10MM [mm]
  rect 1.2x0.3 smd: 1(-5.75,3.75) 2(-5.75,3.25) 3(-5.75,2.75) 4(-5.75,2.25) 5(-5.75,1.75) 6(-5.75,1.25) 7(-5.75,0.75) 8(-5.75,0.25) 9(-5.75,-0.25) 10(-5.75,-0.75) 11(-5.75,-1.25) 12(-5.75,-1.75) 13(-5.75,-2.25) 14(-5.75,-2.75) 15(-5.75,-3.25) 16(-5.75,-3.75) 33(5.75,-3.75) 34(5.75,-3.25) 35(5.75,-2.75) 36(5.75,-2.25) 37(5.75,-1.75) 38(5.75,-1.25) 39(5.75,-0.75) 40(5.75,-0.25) 41(5.75,0.25) 42(5.75,0.75) 43(5.75,1.25) 44(5.75,1.75) 45(5.75,2.25) 46(5.75,2.75) 47(5.75,3.25) 48(5.75,3.75)
  rect 0.3x1.2 smd: 17(-3.75,-5.75) 18(-3.25,-5.75) 19(-2.75,-5.75) 20(-2.25,-5.75) 21(-1.75,-5.75) 22(-1.25,-5.75) 23(-0.75,-5.75) 24(-0.25,-5.75) 25(0.25,-5.75) 26(0.75,-5.75) 27(1.25,-5.75) 28(1.75,-5.75) 29(2.25,-5.75) 30(2.75,-5.75) 31(3.25,-5.75) 32(3.75,-5.75) 49(3.75,5.75) 50(3.25,5.75) 51(2.75,5.75) 52(2.25,5.75) 53(1.75,5.75) 54(1.25,5.75) 55(0.75,5.75) 56(0.25,5.75) 57(-0.25,5.75) 58(-0.75,5.75) 59(-1.25,5.75) 60(-1.75,5.75) 61(-2.25,5.75) 62(-2.75,5.75) 63(-3.25,5.75) 64(-3.75,5.75)
  silkscreen extent -6.93,-5.13 5.13,5.13, body extent -6,-6 6,6, height 1.6
MODULE_ESP32-WROOM-32D [mm]
  rect 2x0.9 smd: 1(-8.5,5.26) 2(-8.5,3.99) 3(-8.5,2.72) 4(-8.5,1.45) 5(-8.5,0.18) 6(-8.5,-1.09) 7(-8.5,-2.36) 8(-8.5,-3.63) 9(-8.5,-4.9) 10(-8.5,-6.17) 11(-8.5,-7.44) 12(-8.5,-8.71) 13(-8.5,-9.98) 14(-8.5,-11.25) 25(8.5,-11.25) 26(8.5,-9.98) 27(8.5,-8.71) 28(8.5,-7.44) 29(8.5,-6.17) 30(8.5,-4.9) 31(8.5,-3.63) 32(8.5,-2.36) 33(8.5,-1.09) 34(8.5,0.18) 35(8.5,1.45) 36(8.5,2.72) 37(8.5,3.99) 38(8.5,5.26)
  rect 0.9x2 smd: 15(-5.715,-12.25) 16(-4.445,-12.25) 17(-3.175,-12.25) 18(-1.905,-12.25) 19(-0.635,-12.25) 20(0.635,-12.25) 21(1.905,-12.25) 22(3.175,-12.25) 23(4.445,-12.25) 24(5.715,-12.25)
  rect 3x3 smd: 39(-1,-2.24)
  1-SIG-TOP region: -3.5,0.26 1.5,0.26 1.5,-4.74 -3.5,-4.74
  Keep-Out Layer region: -9.5,12.7 9.5,12.7 9.5,6.4 -9.5,6.4
  silkscreen extent -9.85,-12.75 9,12.75, body extent -9,-12.75 9,12.75, height 3.25
MOLEX_2012670005 [mm] "USB-C (USB TYPE-C) USB 3.2 Gen 2 (USB 3.1 Gen 2, Superspeed + (USB 3.1)) Receptacle Connector 24 Position Surface Mount, Right Angle; Through Hole"
  rect 0.3x0.7 smd: A1(-3,3.97) A2(-2.5,3.97) A3(-2,3.97) A4(-1.5,3.97) A5(-1,3.97) A6(-0.5,3.97) A7(0.5,3.97) A8(1,3.97) A9(1.5,3.97) A10(2,3.97) A11(2.5,3.97) A12(3,3.97) B2(2.25,2.27) B3(1.75,2.27) B4(1.25,2.27) B5(0.75,2.27) B6(0.25,2.27) B7(-0.25,2.27) B8(-0.75,2.27) B9(-1.25,2.27) B10(-1.75,2.27) B11(-2.25,2.27)
  rect 0.9x0.7 smd: B1(3.05,2.27) B12(-3.05,2.27)
  oval 1.1x2.1 hole 0.6 slot 1.6 at 90 deg: S1(-4.32,3.16) S2(4.32,3.16)
  oval 1.1x3.6 hole 0.6 slot 2.1 at 90 deg copper offset 0,0.5: S3(-4.62,-2.2) S4(4.62,-2.2)
  body extent -4.7,-4.15 4.69,4.15, height 3.72
MOUNTHOLE_M2 [mm] "Mount Hole M2"
  round 4 hole 2.2 paste-2 mask-2: 1(0,0)
  body extent -2,-2 2,2
NC_SOLDERBRIDGE_0603 [mil]
  rect 26x35 smd: 1(-27.56,0) 2(27.56,0)
  1-SIG-TOP region: -16,10 16,10 16,-10 -16,-10
  silkscreen extent -5,-20 5,20
"NET TIE 6X30MIL" [mil]
  rect 16x6 smd paste-5 mask-5: 1(-7,0) 2(7,0)
NO_SOLDERBRIDGE_0603 [mil]
  rect 26x35 smd: 1(-27.56,0) 2(27.56,0)
  1-SIG-TOP keep-out region: -8,-17.72 8,-17.72 8,17.72 -8,17.72
  silkscreen extent -5,-20 5,20
PLANE-2 [mil]
  2-GND region: -4.92,-4.92 88.58,-4.92 88.58,98.43 -4.92,98.43
  2-GND region: 93.5,4.92 122.18,4.92 122.18,88.58 93.5,88.58
  2-GND region: 177.17,72.06 177.17,88.58 93.5,88.58 93.5,72.06
  2-GND region: 177.17,88.58 154.46,88.58 154.46,4.92 177.17,4.92
  2-GND region: 93.5,21.73 93.5,4.92 177.16,4.92 177.16,21.73
  2-GND region: 187.01,-4.92 187.01,0 83.66,0 83.66,-4.92
  2-GND region: 182.09,-4.92 541.34,-4.92 541.34,98.43 182.09,98.43
  2-GND region: 187.01,93.5 187.01,98.43 83.66,98.43 83.66,93.5
  2-GND region: 93.5,4.92 122.18,4.92 122.18,88.58 93.5,88.58
  2-GND region: 177.17,72.06 177.17,88.58 93.5,88.58 93.5,72.06
  2-GND region: 177.17,88.58 154.46,88.58 154.46,4.92 177.17,4.92
  2-GND region: 93.5,21.73 93.5,4.92 177.16,4.92 177.16,21.73
  2-GND region: 83.66,-4.92 88.58,-4.92 88.58,98.43 83.66,98.43
  2-GND region: 187.01,-4.92 187.01,0 83.66,0 83.66,-4.92
PLANE-3 [mil]
  3-PWR region: 270.67,-4.92 541.34,-4.92 541.34,98.43 270.67,98.43
  3-PWR region: 275.59,-4.92 275.59,0 172.24,0 172.24,-4.92
  3-PWR region: 182.09,21.73 182.09,4.92 265.75,4.92 265.75,21.73
  3-PWR region: 265.75,88.58 243.65,88.58 243.65,4.92 265.75,4.92
  3-PWR region: 265.75,72.06 265.75,88.58 182.09,88.58 182.09,72.06
  3-PWR region: 182.09,4.92 210.85,4.92 210.85,88.58 182.09,88.58
  3-PWR region: 275.59,93.5 275.59,98.43 172.24,98.43 172.24,93.5
  3-PWR region: -4.92,-4.92 173.21,-4.92 173.21,98.43 -4.92,98.43
  3-PWR region: 275.59,-4.92 275.59,0 172.24,0 172.24,-4.92
  3-PWR region: 182.09,21.73 182.09,4.92 265.75,4.92 265.75,21.73
  3-PWR region: 265.75,88.58 243.65,88.58 243.65,4.92 265.75,4.92
  3-PWR region: 265.75,72.06 265.75,88.58 182.09,88.58 182.09,72.06
  3-PWR region: 182.09,4.92 210.85,4.92 210.85,88.58 182.09,88.58
  3-PWR region: 275.59,93.5 275.59,98.43 172.24,98.43 172.24,93.5
  3-PWR region: 83.66,-4.92 88.58,-4.92 88.58,98.43 83.66,98.43
  3-PWR region: 172.24,-4.92 177.17,-4.92 177.17,98.43 172.24,98.43
QFN28_5X5 [mm]
  rrect100% 0.9x0.3 smd paste+0 mask+0.05: 1(-2.324,1.5) 2(-2.324,1) 3(-2.324,0.5) 4(-2.324,0) 5(-2.324,-0.5) 6(-2.324,-1) 7(-2.324,-1.5) 15(2.324,-1.5) 16(2.324,-1) 17(2.324,-0.5) 18(2.324,0) 19(2.324,0.5) 20(2.324,1) 21(2.324,1.5)
  rrect100% 0.3x0.9 smd paste+0 mask+0.05: 8(-1.5,-2.324) 9(-1,-2.324) 10(-0.5,-2.324) 11(0,-2.324) 12(0.5,-2.324) 13(1,-2.324) 14(1.5,-2.324) 22(1.5,2.324) 23(1,2.324) 24(0.5,2.324) 25(0,2.324) 26(-0.5,2.324) 27(-1,2.324) 28(-1.5,2.324)
  rect 2x2 smd paste-2 mask+0.05: 29(0,0)
  1-SIG-TOP region: -1.675,1.675 1.675,1.675 1.675,-1.675 -1.675,-1.675
  silkscreen extent -2.63,-2.63 2.63,2.63, body extent -2.55,-2.55 2.55,2.55, height 0.94
"QFN 3.5X1.2-16L" [mm] "Micro QFN 3.5x1.2-16L footprint"
  rect 0.45x0.2 smd mask+0.05: 1(-0.575,1.4) 2(-0.575,1) 3(-0.575,0.6) 4(-0.575,0.2) 5(-0.575,-0.2) 6(-0.575,-0.6) 7(-0.575,-1) 8(-0.575,-1.4) 9(0.575,-1.4) 10(0.575,-1) 11(0.575,-0.6) 12(0.575,-0.2) 13(0.575,0.2) 14(0.575,0.6) 15(0.575,1) 16(0.575,1.4)
  rect 0.3x0.3 smd mask+0.05: 17(0,0)
  1-SIG-TOP region: -0.15,1.4 0.15,1.4 0.15,-1.4 -0.15,-1.4
  silkscreen extent -1.33,-1.88 0.63,1.88, body extent -0.63,-1.78 0.63,1.78, height 0.55
QFN-6L [mm]
  rect 0.6x0.25 smd: 1(-0.65,0.5) 2(-0.65,0) 3(-0.65,-0.5) 4(0.65,-0.5) 5(0.65,0) 6(0.65,0.5)
  silkscreen extent -1.38,-1.03 0.92,1.07, body extent -0.77,-0.87 0.77,0.87, height 0.55
"QFN-EP 24" [mm]
  rect 0.6x0.24 smd: 1(-1.9,1.25) 2(-1.9,0.75) 3(-1.9,0.25) 4(-1.9,-0.25) 5(-1.9,-0.75) 6(-1.9,-1.25) 13(1.9,-1.25) 14(1.9,-0.75) 15(1.9,-0.25) 16(1.9,0.25) 17(1.9,0.75) 18(1.9,1.25)
  rect 0.24x0.6 smd: 7(-1.25,-1.9) 8(-0.75,-1.9) 9(-0.25,-1.9) 10(0.25,-1.9) 11(0.75,-1.9) 12(1.25,-1.9) 19(1.25,1.9) 20(0.75,1.9) 21(0.25,1.9) 22(-0.25,1.9) 23(-0.75,1.9) 24(-1.25,1.9)
  rect 1x1 smd paste-10: EP(0,0)
  1-SIG-TOP region: -1.225,-1.225 1.225,-1.225 1.225,1.225 -1.225,1.225
  silkscreen extent -2.59,-2.2 2.2,2.2, body extent -2.07,-2.07 2.08,2.07, height 0.8
QG-2864KSWEG01_FLIPPED [mm] "Folding Type OLED Display Module"
  round 0.3 hole 0.4 unplated mask+0: 0(-3.75,-8) 0(-3.75,8)
  rrect20% 2.5x0.45 smd mask+0.05: 1(0.25,10.15) 2(0.25,9.45) 3(0.25,8.75) 4(0.25,8.05) 5(0.25,7.35) 6(0.25,6.65) 7(0.25,5.95) 8(0.25,5.25) 9(0.25,4.55) 10(0.25,3.85) 11(0.25,3.15) 12(0.25,2.45) 13(0.25,1.75) 14(0.25,1.05) 15(0.25,0.35) 16(0.25,-0.35) 17(0.25,-1.05) 18(0.25,-1.75) 19(0.25,-2.45) 20(0.25,-3.15) 21(0.25,-3.85) 22(0.25,-4.55) 23(0.25,-5.25) 24(0.25,-5.95) 25(0.25,-6.65) 26(0.25,-7.35) 27(0.25,-8.05) 28(0.25,-8.75) 29(0.25,-9.45) 30(0.25,-10.15)
  1-SIG-TOP keep-out region: -2,10.5 -1.168,10.5 -1.168,-10.5 -2,-10.5
  1-SIG-TOP keep-out region: -8,6 -5.5,6 -4.675,7.62 -3.378,7.62 -3.378,10.211 -3.25,10.5 -2,10.5 -2,-10.5 -3.25,-10.5 -3.378,-10.216 -3.378,-7.62 -4.699,-7.62 -5.5,-6 -8,-6
  body extent -1,-13.5 18.5,13.5, height 7.47
R0402 [mm]
  rrect35% 0.5x0.55 smd: 1(-0.5,0) 2(0.5,0)
  silkscreen extent -1,-0.51 1,0.5, body extent -0.53,-0.25 0.53,0.25, height 0.71
R0603 [mm]
  rrect35% 0.8x0.991 smd: 1(-0.85,0) 2(0.85,0)
  silkscreen extent -1.5,-0.75 1.5,0.75, body extent -0.8,-0.41 0.8,0.41, height 0.71
R0805 [mm]
  rrect20% 1x1.35 smd: 1(-0.9,0) 2(0.9,0)
  silkscreen extent -1.7,-1 1.7,1, body extent -1.05,-0.67 1.05,0.67, height 0.6
R2512 [mm] "RES 2512"
  rrect10% 1.65x3.68 smd: 1(-2.9,0) 2(2.9,0)
  silkscreen extent -1.27,-1.78 1.27,1.78, body extent -3.15,-1.6 3.15,1.6, height 0.71
RGY20_3P05X2P05 [mm]
  rrect35% 0.24x0.6 smd mask+0.07: 1(-0.75,2.225) 10(-0.75,-2.225) 11(0.75,-2.225) 20(0.75,2.225)
  rrect35% 0.6x0.24 smd mask+0.07: 2(-1.725,1.75) 3(-1.725,1.25) 4(-1.725,0.75) 5(-1.725,0.25) 6(-1.725,-0.25) 7(-1.725,-0.75) 8(-1.725,-1.25) 9(-1.725,-1.75) 12(1.725,-1.75) 13(1.725,-1.25) 14(1.725,-0.75) 15(1.725,-0.25) 16(1.725,0.25) 17(1.725,0.75) 18(1.725,1.25) 19(1.725,1.75)
  rect 0.5x0.5 smd paste-1.512 mask+0.05: 21(0,0)
  1-SIG-TOP region: -1.025,-1.525 1.025,-1.525 1.025,1.525 -1.025,1.525
  1-SIG-TOP region: 0,1.525 0,1.525 0,1.525 0,1.525 0,1.525 0,1.525 0,1.525 0,1.525
  1-SIG-TOP region: 0,-1.525 0,-1.525 0,-1.525 0,-1.525 0,-1.525 0,-1.525 0,-1.525 0,-1.525
  silkscreen extent -1.83,-2.33 1.83,2.33, body extent -1.75,-2.25 1.75,2.25, height 1
RMG12_TEX [mm]
  rect 0.9x0.2 smd mask+0.05: 1(-0.65,0.2) 2(-0.65,-0.2) 7(0.65,-0.2) 8(0.65,0.2)
  rect 0.2x0.6 smd mask+0.05: 3(-0.6,-0.8) 4(-0.2,-0.8) 5(0.2,-0.8) 6(0.6,-0.8) 9(0.6,0.8) 10(0.2,0.8) 11(-0.2,0.8) 12(-0.6,0.8)
  silkscreen extent -1.6,-0.95 1.1,0.95, body extent -0.95,-0.95 0.95,0.95, height 0.81
RSE10_TEX [mm]
  rect 0.55x0.25 smd paste-0.15 mask+0.05: 1(-0.635,0.75) 4(-0.635,-0.75) 6(0.635,-0.75) 9(0.635,0.75)
  rect 0.55x0.2 smd mask+0.05: 2(-0.635,0.25) 3(-0.635,-0.25) 7(0.635,-0.25) 8(0.635,0.25)
  rect 0.3x0.6 smd mask+0.05: 5(0,-0.86) 10(0,0.86)
  silkscreen extent -1.25,-1.2 1,1.2, body extent -0.75,-1 0.75,1, height 0.6
RSV16_TEX [mm]
  rrect50% 0.7x0.2 smd paste+0 mask+0.05: 1(-0.75,0.6)
  rrect50% 0.6x0.2 smd paste+0 mask+0.05: 2(-0.8,0.2) 3(-0.8,-0.2) 4(-0.8,-0.6) 9(0.8,-0.6) 10(0.8,-0.2) 11(0.8,0.2) 12(0.8,0.6)
  rrect50% 0.2x0.6 smd paste+0 mask+0.05: 5(-0.6,-1.2) 6(-0.2,-1.2) 7(0.2,-1.2) 8(0.6,-1.2) 13(0.6,1.2) 14(0.2,1.2) 15(-0.2,1.2) 16(-0.6,1.2)
  silkscreen extent -1.3,-1.58 1.18,1.58, body extent -0.97,-1.38 0.97,1.38, height 0.55
RTE0016C [mm]
  rrect100% 0.85x0.28 smd paste-0.025 mask+0.05: 1(-1.475,0.75) 2(-1.475,0.25) 3(-1.475,-0.25) 4(-1.475,-0.75) 9(1.475,-0.75) 10(1.475,-0.25) 11(1.475,0.25) 12(1.475,0.75)
  rrect100% 0.28x0.85 smd paste-0.025 mask+0.05: 5(-0.75,-1.475) 6(-0.25,-1.475) 7(0.25,-1.475) 8(0.75,-1.475) 13(0.75,1.475) 14(0.25,1.475) 15(-0.25,1.475) 16(-0.75,1.475)
  rect 0.5x0.5 smd paste-2 mask+0.05: 17(0,0)
  1-SIG-TOP region: -0.85,-0.85 0.85,-0.85 0.85,0.85 -0.85,0.85
  silkscreen extent -2.2,-1.72 1.72,1.73, body extent -1.5,-1.5 1.5,1.5, height 0.8
RTW0024 [mm] "WQFN24 Plastic Quad Flatpack No-Lead"
  rrect100% 0.82x0.28 smd paste-0.025 mask+0.05: 1(-1.95,1.25) 2(-1.95,0.75) 3(-1.95,0.25) 4(-1.95,-0.25) 5(-1.95,-0.75) 6(-1.95,-1.25) 13(1.95,-1.25) 14(1.95,-0.75) 15(1.95,-0.25) 16(1.95,0.25) 17(1.95,0.75) 18(1.95,1.25)
  rrect100% 0.28x0.82 smd paste-0.025 mask+0.05: 7(-1.25,-1.95) 8(-0.75,-1.95) 9(-0.25,-1.95) 10(0.25,-1.95) 11(0.75,-1.95) 12(1.25,-1.95) 19(1.25,1.95) 20(0.75,1.95) 21(0.25,1.95) 22(-0.25,1.95) 23(-0.75,1.95) 24(-1.25,1.95)
  rect 0.5x0.5 smd paste-5 mask+0.05: 25(0,0)
  1-SIG-TOP region: -1.35,-1.35 1.35,-1.35 1.35,1.35 -1.35,1.35
  silkscreen extent -2.6,-2 2,2, body extent -2,-2 2,2, height 0.8
RWK11 [mm]
  rect 1.15x0.275 smd paste-1 mask-0.038: 1(-0.675,0.225) 7(0.675,0.225)
  rect 2.5x0.275 smd paste-1 mask-0.038: 2(0,-0.225)
  rrect100% 0.25x0.575 smd paste+0 mask+0.05: 3(-0.75,-0.913) 4(-0.25,-0.913) 5(0.25,-0.913) 6(0.75,-0.913) 8(0.75,0.913) 9(0.25,0.913) 10(-0.25,0.913) 11(-0.75,0.913)
  silkscreen extent -1.56,0.22 -1.49,0.29, body extent -1.21,-1.05 1.21,1.05, height 0.99
SIGNAL-1 [mil]
  1-SIG-TOP region: 88.58,0 93.5,0 93.5,93.5 88.58,93.5
  1-SIG-TOP region: 0,4.92 0,-35 93.5,-35 93.5,4.92
  1-SIG-TOP region: 93.5,93.5 88.58,93.5 88.58,0 93.5,0
  1-SIG-TOP region: 93.5,88.58 93.5,93.5 0,93.5 0,88.58
  1-SIG-TOP region: 0,0 4.92,0 4.92,93.5 0,93.5
  1-SIG-TOP pour cut-out: -4.92,98.43 -4.92,-4.92 541.34,-4.92 541.34,98.42
SIGNAL-4 [mil]
  4-SIG-HOR region: 354.33,0 359.25,0 359.25,93.5 354.33,93.5
  4-SIG-HOR region: 359.25,88.58 359.25,93.5 265.75,93.5 265.75,88.58
  4-SIG-HOR region: 359.25,93.5 354.33,93.5 354.33,0 359.25,0
  4-SIG-HOR region: 0,4.92 0,-35 359.25,-35 359.25,4.92
  4-SIG-HOR region: 270.67,93.5 265.75,93.5 265.75,0 270.67,0
  4-SIG-HOR pour cut-out: -4.92,98.43 -4.92,-4.92 541.34,-4.92 541.34,98.43
SIGNAL-5 [mil]
  5-SIG-VERT region: 359.25,93.5 354.33,93.5 354.33,0 359.25,0
  5-SIG-VERT region: 0,4.92 0,-35 447.84,-35 447.84,4.92
  5-SIG-VERT region: 447.83,93.5 442.91,93.5 442.91,0 447.83,0
  5-SIG-VERT region: 447.83,88.58 447.83,93.5 354.33,93.5 354.33,88.58
  5-SIG-VERT region: 442.91,0 447.83,0 447.83,93.5 442.91,93.5
  5-SIG-VERT pour cut-out: -4.92,98.43 -4.92,-4.92 541.34,-4.92 541.34,98.43
SIGNAL-6 [mil]
  1-SIG-TOP region: 531.5,0 536.42,0 536.42,-93.5 531.5,-93.5
  1-SIG-TOP region: 442.91,0 447.83,0 447.83,-93.5 442.91,-93.5
  1-SIG-TOP region: 536.42,-88.58 536.42,-93.5 442.91,-93.5 442.91,-88.58
  1-SIG-TOP region: 536.42,-93.5 531.5,-93.5 531.5,0 536.42,0
  1-SIG-TOP region: 0,-4.92 0,35 536.42,35 536.42,-4.92
  1-SIG-TOP pour cut-out: -4.92,-98.43 -4.92,4.92 541.34,4.92 541.34,-98.43
SMT-0440-S-R_PUI [mm] "Buzzers Transducer, Externally Driven 90mA 4kHz 70dB @ 3V, 10cm Surface Mount Solder Pads"
  rect 0.8x1.6 smd: 1(-1.8,0) 2(1.8,0)
  silkscreen extent -2.1,-2.1 2.1,2.1, body extent -2,-2 2,2, height 2
SOD-123 [mm]
  rect 0.9x0.95 smd: 1(-1.6,0) 2(1.6,0)
  silkscreen extent -1.87,0.7 -1.77,0.8, body extent -1.82,-0.77 1.83,0.78, height 1.15
SOD-128 [mm] "SOD-128"
  rect 1.4x2.1 smd: 1(-2.2,0) 2(2.2,0)
  silkscreen extent -2.64,1.42 -2.44,1.62, body extent -2.35,-1.35 2.35,1.35, height 1
SOD-323F [mm]
  rect 0.8x0.8 smd: 1(-1.115,0) 2(1.115,0)
  silkscreen extent -1.5,0.79 -1.3,0.99, body extent -1.25,-0.65 1.25,0.65, height 1
SODFL100X40-2N [mm] "SODFL, 2-Leads, Body 0.60x1.00mm, IPC Medium Density"
  rect 0.36x0.25 smd: 1(-0.42,0) 2(0.42,0)
  silkscreen extent -0.56,0.33 -0.46,0.43, body extent -0.5,-0.33 0.5,0.33, height 0.4
SODFL375X95-2N [mm] "SODFL, 2-Leads, Body 1.90x3.75mm, IPC Medium Density"
  rect 0.7x0.95 smd: 1(-1.75,0)
  rect 2x1.95 smd: 1(-0.432,0)
  rect 0.95x0.65 smd: 2(1.7,0)
  silkscreen extent -2,0.92 -1.81,1.12, body extent -1.88,-1.02 1.88,1.02, height 0.95
SON_400UV-7_DIO [mm]
  rect 0.67x0.3 smd: 1(-0.64,0.5) 2(-0.64,0) 3(-0.64,-0.5) 4(0.64,-0.5) 5(0.64,0) 6(0.64,0.5)
  silkscreen extent -1.19,-0.98 0.75,1.07, body extent -0.8,-0.8 0.8,0.8, height 0.5
SOT50P160X60-6N [mm]
  rect 0.66x0.31 smd: 1(-0.735,0.5) 2(-0.735,0) 3(-0.735,-0.5) 4(0.735,-0.5) 5(0.735,0) 6(0.735,0.5)
  silkscreen extent -1.07,-0.97 0.6,1.07, body extent -0.8,-0.8 0.8,0.8, height 0.6
SOT363_SOP65P210X265-6N [mm] "SOP, 6-Leads, Body 2.00x1.25mm, Pitch 0.65mm, IPC Medium Density"
  rrect30% 0.66x0.3 smd mask+0.05: 1(-0.92,0.65) 2(-0.92,0) 3(-0.92,-0.65) 4(0.92,-0.65) 5(0.92,0) 6(0.92,0.65)
  silkscreen extent -1.1,-1.1 0.2,1.35, body extent -1.1,-1.1 1.1,1.1, height 1.1
SOT908-1 [mm]
  rrect100% 0.8x0.25 smd mask+0.05: 1(-1.5,0.75) 2(-1.5,0.25) 3(-1.5,-0.25) 4(-1.5,-0.75) 5(1.5,-0.75) 6(1.5,-0.25) 7(1.5,0.25) 8(1.5,0.75)
  rect 0.5x0.5 smd mask+0.05: 9(0,0)
  1-SIG-TOP region: -0.825,-1.05 0.825,-1.05 0.825,1.05 -0.825,1.05
  silkscreen extent -2.1,-1.68 1.68,1.73, body extent -1.55,-1.55 1.55,1.55, height 1
SOT-23-5 [mm]
  rrect20% 1.1x0.6 smd mask+0.05: 1(-1.3,0.95) 2(-1.3,0) 3(-1.3,-0.95) 4(1.3,-0.95) 5(1.3,0.95)
  silkscreen extent -1.55,-1.4 0.4,1.65, body extent -1.4,-1.5 1.4,1.5, height 1.25
SOT-23-6 [mm]
  rrect20% 1.1x0.6 smd mask+0.05: 1(-1.3,0.95) 2(-1.3,0) 3(-1.3,-0.95) 4(1.3,-0.95) 5(1.3,0) 6(1.3,0.95)
  silkscreen extent -1.55,-1.5 0.5,1.65, body extent -1.4,-1.5 1.4,1.5, height 1.25
SOT-143 [mm]
  rect 1.4x1.2 smd: 1(-1.1,0.85)
  rect 1.4x1 smd: 2(-1.1,-0.95) 3(1.1,-0.95) 4(1.1,0.95)
  silkscreen extent -1.55,1.75 -1.45,1.85, body extent -1.32,-1.45 1.32,1.45, height 1.17
SOT-323 [mm]
  rect 0.8x0.6 smd: 1(-0.9,0.65) 2(-0.9,-0.65) 3(0.9,0)
  body extent -1.05,-1.07 1.05,1.08, height 1.05
SOT-416FL_ONS [mm]
  rect 0.6x0.356 smd: 1(-0.65,0.495) 2(-0.65,-0.495) 3(0.65,0)
  silkscreen extent -0.75,-0.95 0.57,1.05, body extent -0.85,-0.83 0.85,0.83, height 0.89
ST_QFN_1610 [mm] "2-UDFN"
  rect 0.55x0.8 smd: 1(-0.65,0) 2(0.65,0)
  silkscreen extent -0.95,0.75 -0.85,0.85, body extent -0.85,-0.55 0.85,0.55, height 0.6
"SWITCH USLPT2819DT2TR TACTILE TE" [mm] "Tactile Switch SPST-NO Top Actuated Surface Mount"
  rect 0.55x0.57 smd: 1(-1.275,0.58) 1(1.275,0.58) 2(-1.275,-0.58) 2(1.275,-0.58)
  body extent -1.5,-0.95 1.5,0.95, height 0.6
TC2030-IDC-NL [mil] "Tag-Connect 6-Pin with No Legs (PN# TC2030-IDC-NL)"
  round 39 hole 39 unplated paste-20: 0(-100,0) 0(100,-40) 0(100,40)
  round 31 smd paste-16: 1(-50,-25) 2(-50,25) 3(0,-25) 4(0,25) 5(50,-25) 6(50,25)
  1-SIG-TOP pour cut-out: -50,25 50,25 50,-25 -50,-25
  1-SIG-TOP keep-out region: -44,16 44,16 44,-16 -44,-16
  silkscreen extent -79,-50 69,50
TC2050-IDC-NL [mil] "Tag-Connect 10-Pin with No Legs (PN# TC2050-IDC-NL)"
  round 39 hole 39 unplated: 0(-40,-150) 0(0,150) 0(40,-150)
  round 31 smd paste-16: 1(-25,100) 2(-25,50) 3(-25,0) 4(-25,-50) 5(-25,-100) 6(25,-100) 7(25,-50) 8(25,0) 9(25,50) 10(25,100)
  1-SIG-TOP pour cut-out: -25,100 25,100 25,-100 -25,-100
  1-SIG-TOP keep-out region: 16,100 16,-100 -16,-100 -16,100
  silkscreen extent -50,-118 50,128
TESTPOINT [mm] "Test Point"
  round 1 smd paste-0.508 mask-0.025: 1(0,0)
  body extent -0.5,-0.5 0.5,0.5
UDFN8_2X3MC_MCH [mm] "8-UFDFN Exposed Pad"
  rrect30% 0.85x0.3 smd mask+0.05: 1(-1.45,0.75) 2(-1.45,0.25) 3(-1.45,-0.25) 4(-1.45,-0.75) 5(1.45,-0.75) 6(1.45,-0.25) 7(1.45,0.25) 8(1.45,0.75)
  rect 0.5x0.5 smd mask+0.05: 9(0,0)
  1-SIG-TOP region: -0.7,-0.8 0.7,-0.8 0.7,0.8 -0.7,0.8
  silkscreen extent -1.6,-1.15 0.98,1.4, body extent -1.53,-1.03 1.52,1.02, height 0.48
VFQFPN-16_STM [mm]
  rect 0.6x0.3 smd mask+0.05: 1(-1.385,0.75) 2(-1.385,0.25) 3(-1.385,-0.25) 4(-1.385,-0.75) 9(1.385,-0.75) 10(1.385,-0.25) 11(1.385,0.25) 12(1.385,0.75)
  rect 0.3x0.6 smd mask+0.05: 5(-0.75,-1.385) 6(-0.25,-1.385) 7(0.25,-1.385) 8(0.75,-1.385) 13(0.75,1.385) 14(0.25,1.385) 15(-0.25,1.385) 16(-0.75,1.385)
  rect 0.5x0.5 smd mask+0.05: 17(0,0)
  1-SIG-TOP region: -0.9,0.9 0.9,0.9 0.9,-0.9 -0.9,-0.9
  silkscreen extent -2.22,-1.7 1.7,1.7, body extent -1.57,-1.57 1.58,1.58, height 0.94
W-PDFN-8_8X6_P127 [mm]
  rect 1.35x0.8 smd mask+0.05: 1(-3.575,1.905) 2(-3.575,0.635) 3(-3.575,-0.635) 4(-3.575,-1.905) 5(3.575,-1.905) 6(3.575,-0.635) 7(3.575,0.635) 8(3.575,1.905)
  rect 1x1 smd mask+0.05: 9(0,0)
  1-SIG-TOP region: -2,2.5 2,2.5 2,-2.5 -2,-2.5
  silkscreen extent -4.7,-3.1 4.1,3.1, body extent -4,-3 4,3.01, height 0.8
WCAP-ASLI_5X5.5 [mm] "Aluminium Electrolytic V-Chip SMT Capacitors, 5x5.5mm"
  rect 3x1.6 smd: 1(-2.2,0) 2(2.2,0)
  silkscreen extent -2.75,-2.75 2.75,2.75, body extent -3,-2.65 3,2.65, height 5.5
WCAP-ASLI_6.3X5.5 [mm] "Aluminium Electrolytic V-Chip SMT Capacitors, 6.3x5.5mm"
  rect 3.5x1.6 smd: 1(-2.8,0) 2(2.8,0)
  silkscreen extent -3.4,-3.4 3.4,3.4, body extent -3.65,-3.3 3.65,3.3, height 5.5
WQFN20_RUK_TEX [mm]
  rrect100% 0.8x0.2 smd mask+0.05: 1(-1.5,0.8) 2(-1.5,0.4) 3(-1.5,0) 4(-1.5,-0.4) 5(-1.5,-0.8) 11(1.5,-0.8) 12(1.5,-0.4) 13(1.5,0) 14(1.5,0.4) 15(1.5,0.8)
  rrect100% 0.2x0.8 smd mask+0.05: 6(-0.8,-1.5) 7(-0.4,-1.5) 8(0,-1.5) 9(0.4,-1.5) 10(0.8,-1.5) 16(0.8,1.5) 17(0.4,1.5) 18(0,1.5) 19(-0.4,1.5) 20(-0.8,1.5)
  rect 0.5x0.5 smd paste-2 mask+0.05: 21(0,0)
  1-SIG-TOP region: -0.9,0.9 0.9,0.9 0.9,-0.9 -0.9,-0.9
  silkscreen extent -2.13,-1.68 1.68,1.68, body extent -1.5,-1.5 1.5,1.5, height 0.8
"WSON-6 065" [mm]
  rect 0.7x0.3 smd mask+0.05: 1(-1.05,0.65) 2(-1.05,0) 3(-1.05,-0.65) 4(1.05,-0.65) 5(1.05,0) 6(1.05,0.65)
  rect 0.5x0.5 smd mask+0.05: 7(0,0)
  1-SIG-TOP region: -0.5,-0.8 0.5,-0.8 0.5,0.8 -0.5,0.8
  silkscreen extent -1.57,-1.2 1.2,1.2, body extent -1.05,-1.05 1.05,1.05, height 0.8
XTAL_2SM_3R2X1R5 [mm]
  rect 1x1.8 smd: 1(-1.25,0) 2(1.25,0)
  silkscreen extent -0.51,-0.86 0.51,0.86, body extent -1.6,-0.75 1.6,0.75, height 0.8
YAG_YC248 [mil]
  rect 40x11.81 smd: 1(-32.5,68.9) 2(-32.5,49.21) 3(-32.5,29.53) 4(-32.5,9.84) 5(-32.5,-9.84) 6(-32.5,-29.53) 7(-32.5,-49.21) 8(-32.5,-68.9) 9(32.5,-68.9) 10(32.5,-49.21) 11(32.5,-29.53) 12(32.5,-9.84) 13(32.5,9.84) 14(32.5,29.53) 15(32.5,49.21) 16(32.5,68.9)
  silkscreen extent -6,-88 6,88, body extent -31,-83 32,83, height 22

## Part data
B1 C127: "11mF (EDLC) Supercapacitor 3.3V 1210 (3225 Metric)", Capacitance=11mF, Case/Package=1210, Case Code (Metric)=3225, ESR (Equivalent Series Resistance)=160R, Manufacturer=Seiko, Manufacturer Part Number=CPH3225A, Max Operating Temperature=60°C, Min Operating Temperature=-20°C, Package Quantity=2000, Supplier Part Number 1=728-1127-1-ND, Voltage Rating=3.3V, Case Code (Imperial)=1210, ComponentLink1Description=http://www.sii.co.jp/en/me/datasheets/chip-capacitor/cph3225a/?src-supplier=Mouser, ComponentLink1URL=http://www.sii.co.jp/en/me/datasheets/chip-capacitor/cph3225a/?src-supplier=Mouser, ComponentLink2Description=http://www.sii-components.com/document/en/battery/Chip_Capacitor_E.pdf?src-supplier=Avnet+Asia, ComponentLink2URL=http://www.sii-components.com/document/en/battery/Chip_Capacitor_E.pdf?src-supplier=Avnet+Asia, ComponentLink3Description=https://media.digikey.com/pdf/Data%20Sheets/Seiko%20Instruments%20PDFs/CPH3225A_CP3225A.pdf?src-supplier=Digi-Key, ComponentLink3URL=https://media.digikey.com/pdf/Data%20Sheets/Seiko%20Instruments%20PDFs/CPH3225A_CP3225A.pdf?src-supplier=Digi-Key, Height=0.9mm, Height - Seated (Max)=0.035inch, Length=3.2mm, Mount="Surface Mount", Packaging="Tape and Reel", Pricing 1="1=2.02, 10=1.634, 50=1.4256, 100=1.2474, 500=0.9504, 1000=0.8316, 2500=0.8019, 5000=0.7722 (USD)", Stock 1=48098, Supplier 1=Digi-Key, Termination=SMD/SMT, Voltage Rating (DC)=3.3V, Width=2.5mm
BTN1 BTN2: library part "TACT ULTRA TB 2.8X1.9X0.6 160GF", "Tactile Switch SPST-NO Top Actuated Surface Mount", Manufacturer="TE Connectivity", Manufacturer Part Number=USLPT2819DT2TR, Max Operating Temperature=85°C, Min Operating Temperature=-40°C, Operating Force=160gf, Supplier Part Number 1=450-3358-1-ND, Actuator Material=Nylon,Polyamide, Actuator Type=Standard, ComponentLink1Description=https://www.te.com/commerce/DocumentDelivery/DDEController?Action=srchrtrv&amp;DocNm=2337225&amp;DocType=Customer+Drawing&amp;DocLang=English&src-supplier=Digi-Key, ComponentLink1URL=https://www.te.com/commerce/DocumentDelivery/DDEController?Action=srchrtrv&amp;DocNm=2337225&amp;DocType=Customer+Drawing&amp;DocLang=English&src-supplier=Digi-Key, Illumination Type=Non-Illuminated, Mechanical Life=300000Cycles, Mount="Surface Mount", Packaging="Tape and Reel", Pricing 1="1=0.66, 10=0.636, 25=0.612, 100=0.5297, 250=0.4826, 500=0.4473, 1000=0.4002, 2500=0.379 (USD)", Stock 1=7628, Supplier 1=Digi-Key, Switch Function=Off-Mom, Switch Travel=0.13mm, Termination=SMD/SMT, Throw Configuration=SPST